# Altium PCB SmartIMU.PcbDoc (part 1 of 2)
Units mil, origin at the board's own origin, x right, y up, seen from the top; angles counter-clockwise.
Board outline 1102.36 x 1187.1 mil, 4 copper layers (Top Layer, Mid-Layer 1, Mid-Layer 2, Bottom Layer), stack 38.583 mil thick; 68 components, 83 nets, 416 pads, 140 vias.
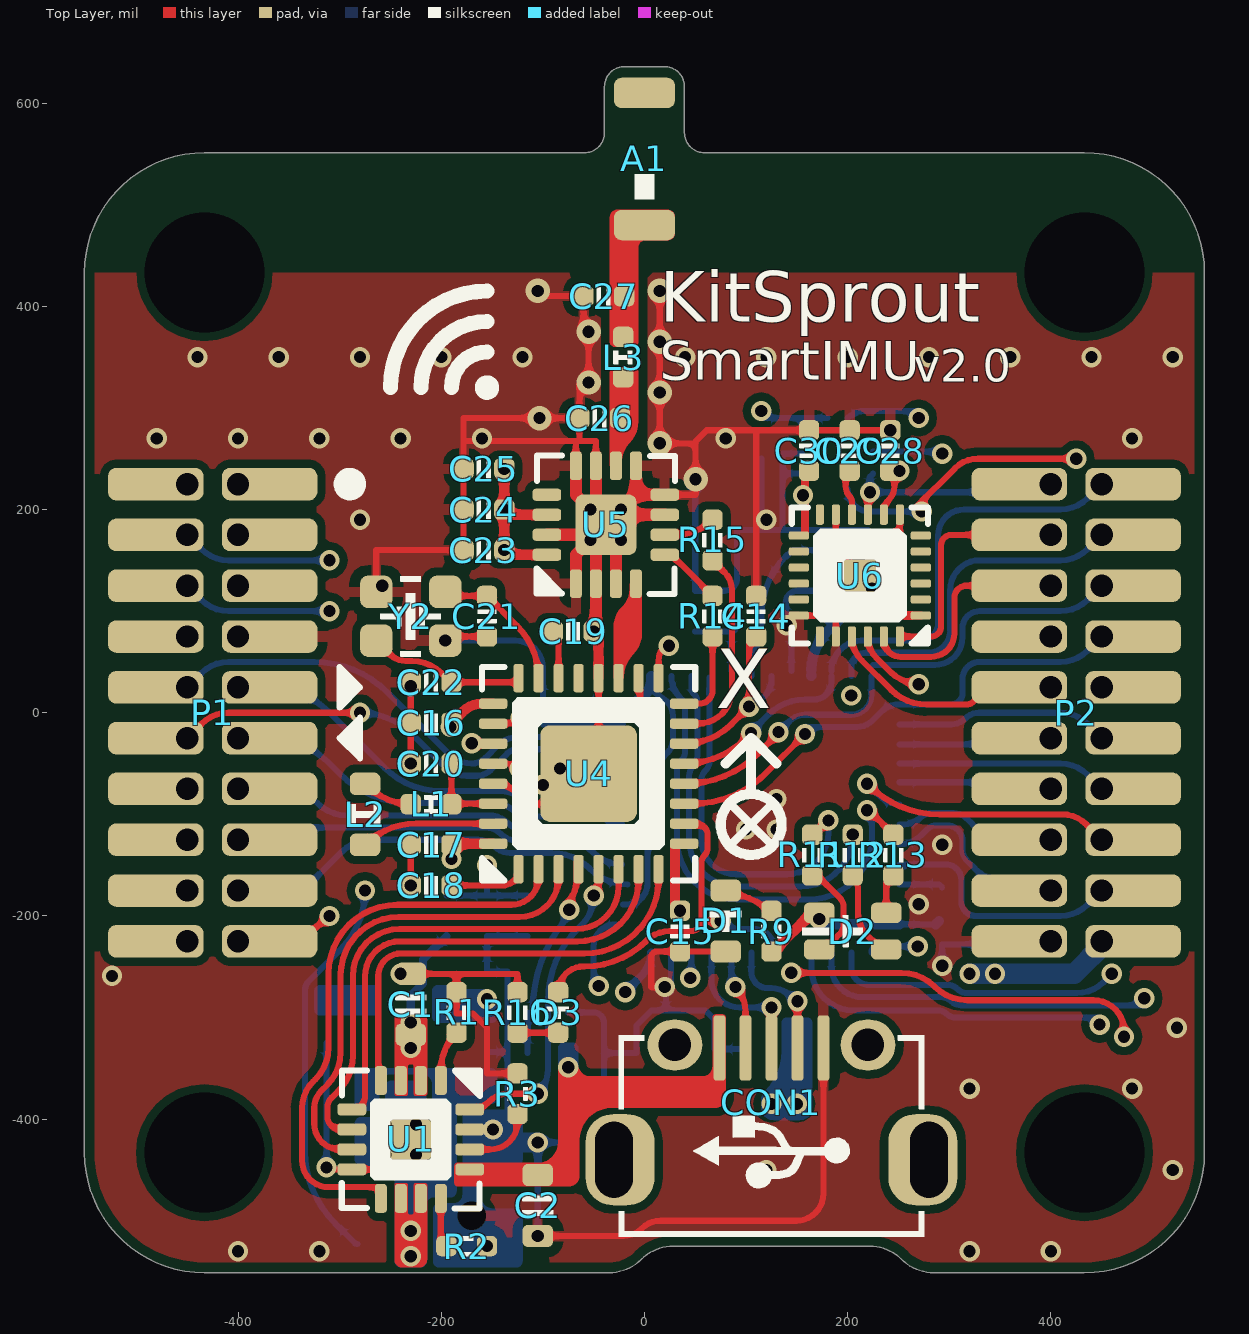
[diagram p0: Top Layer view]
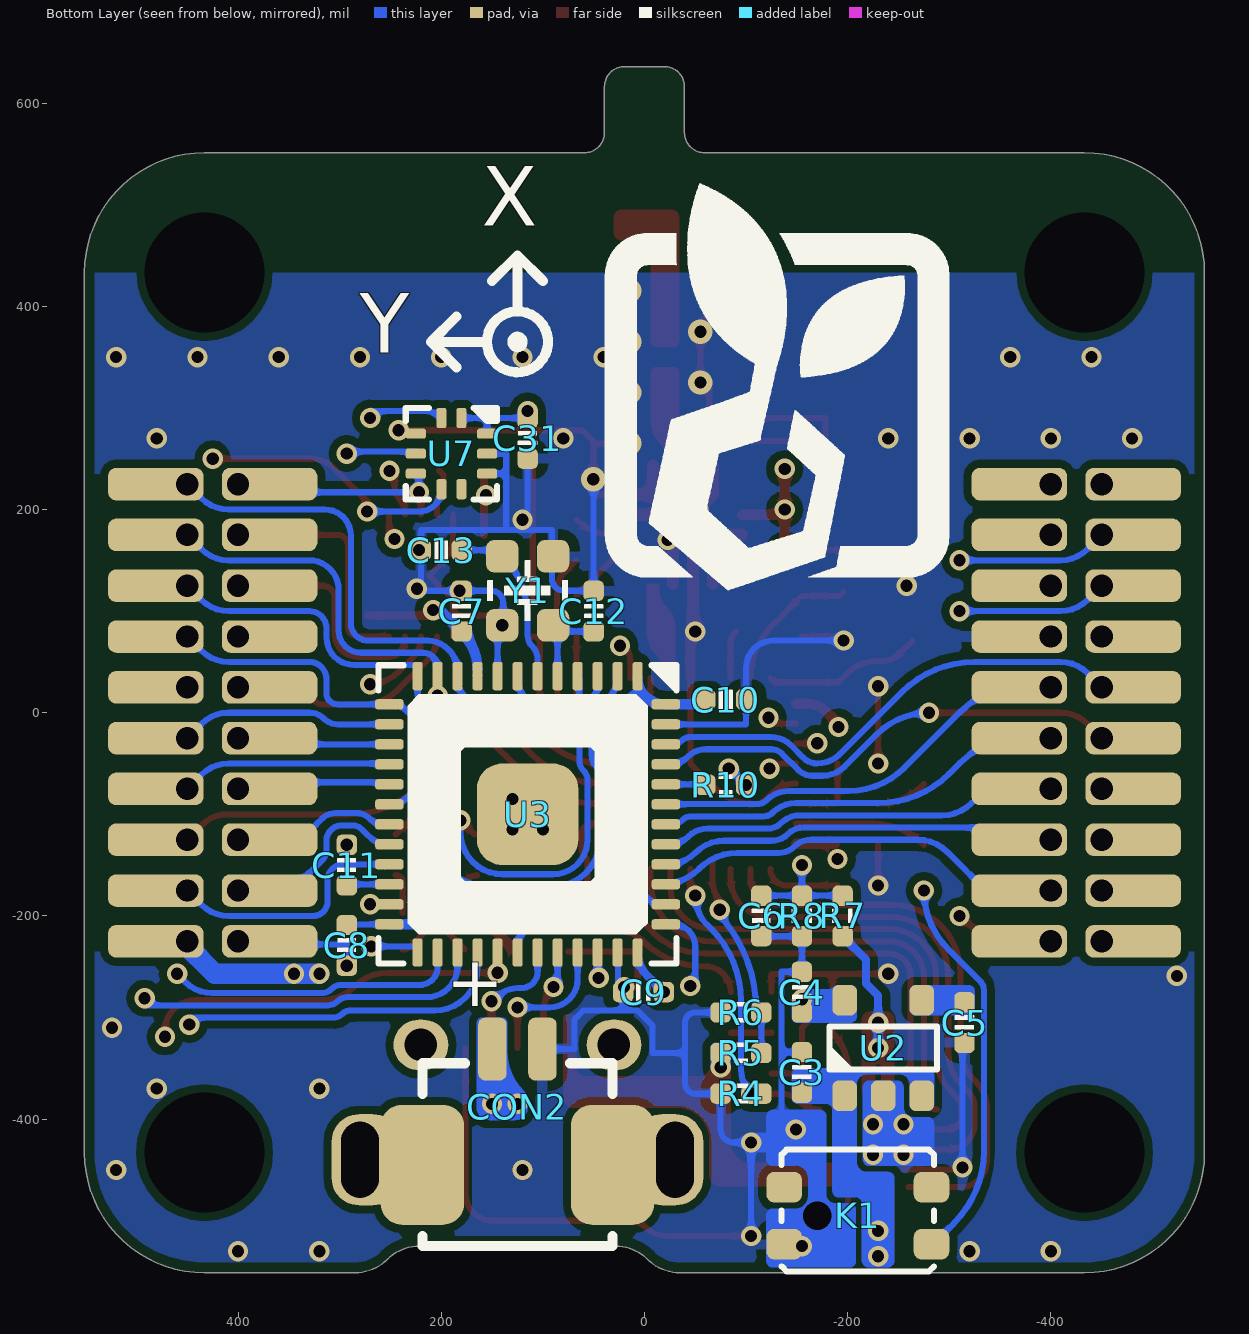
[diagram p1: Bottom Layer view, seen from below]
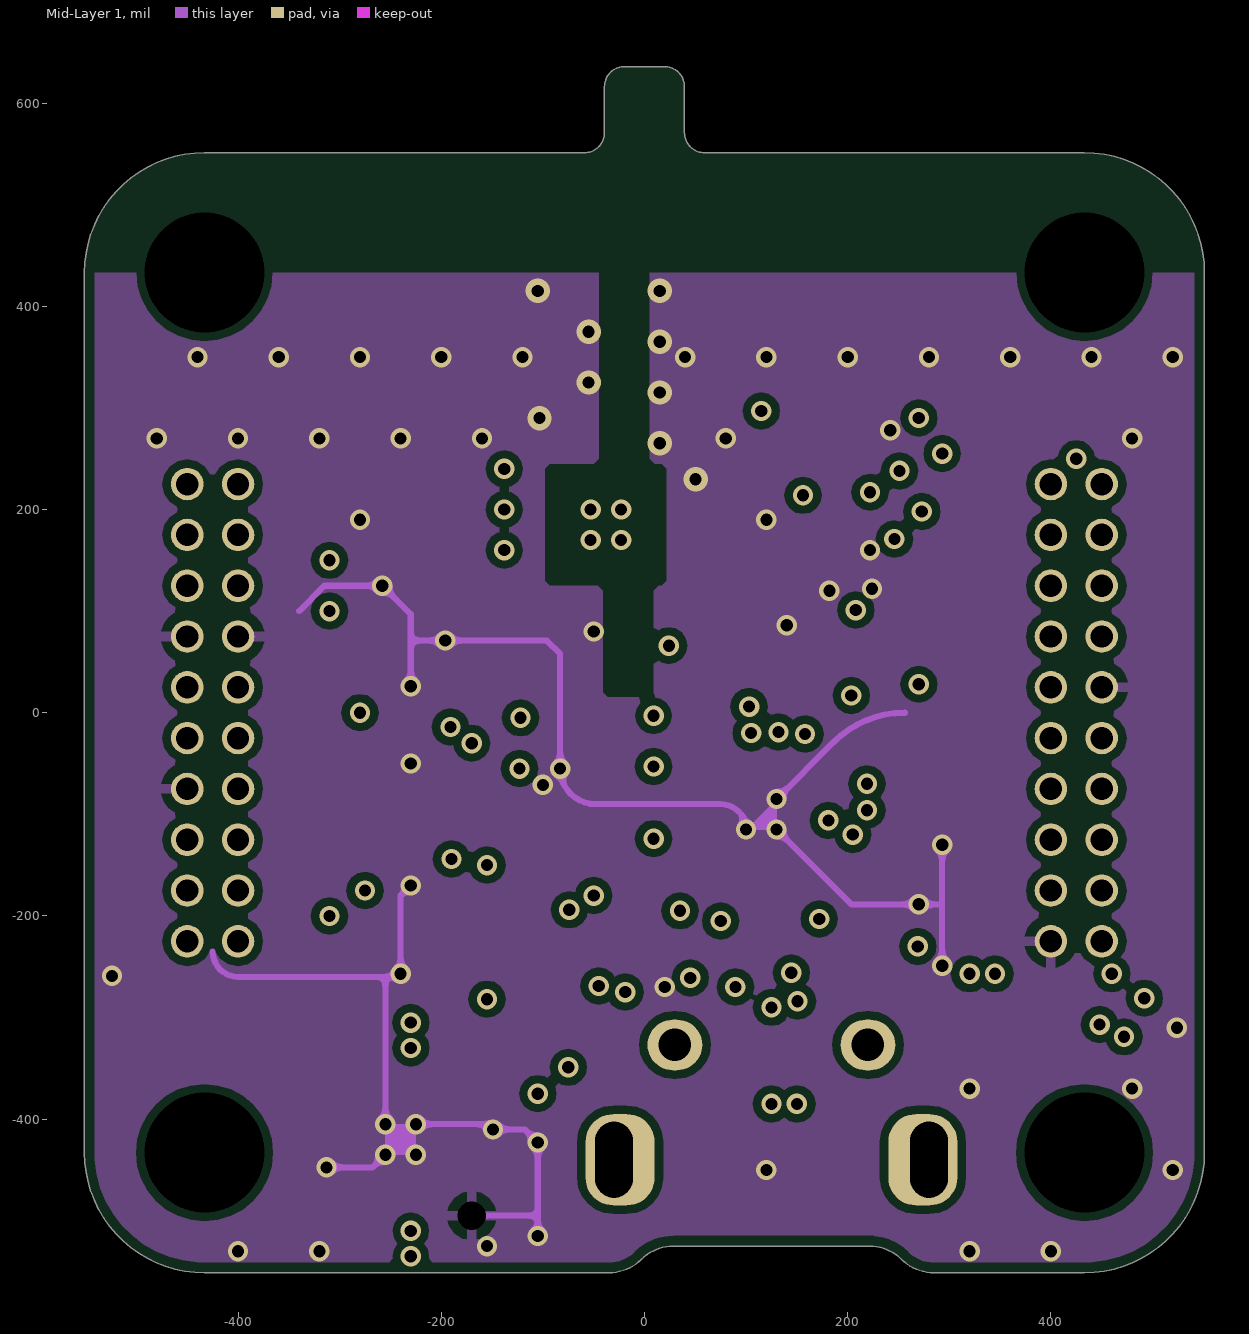
[diagram p2: Mid-Layer 1]
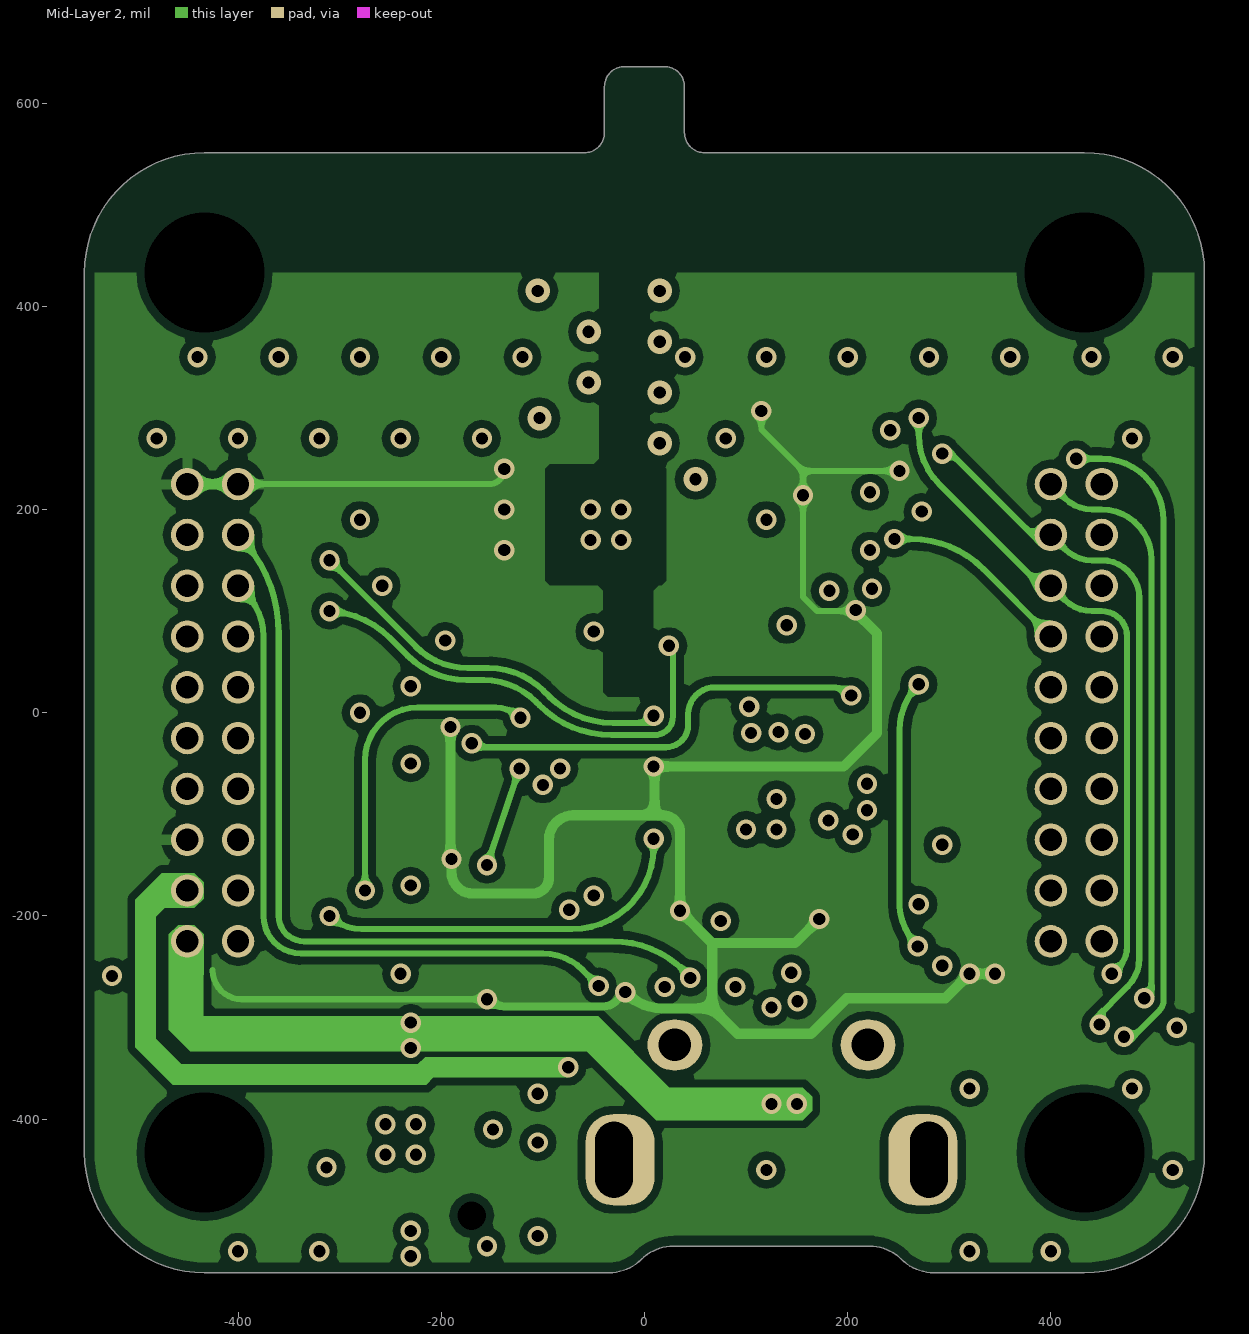
[diagram p3: Mid-Layer 2]
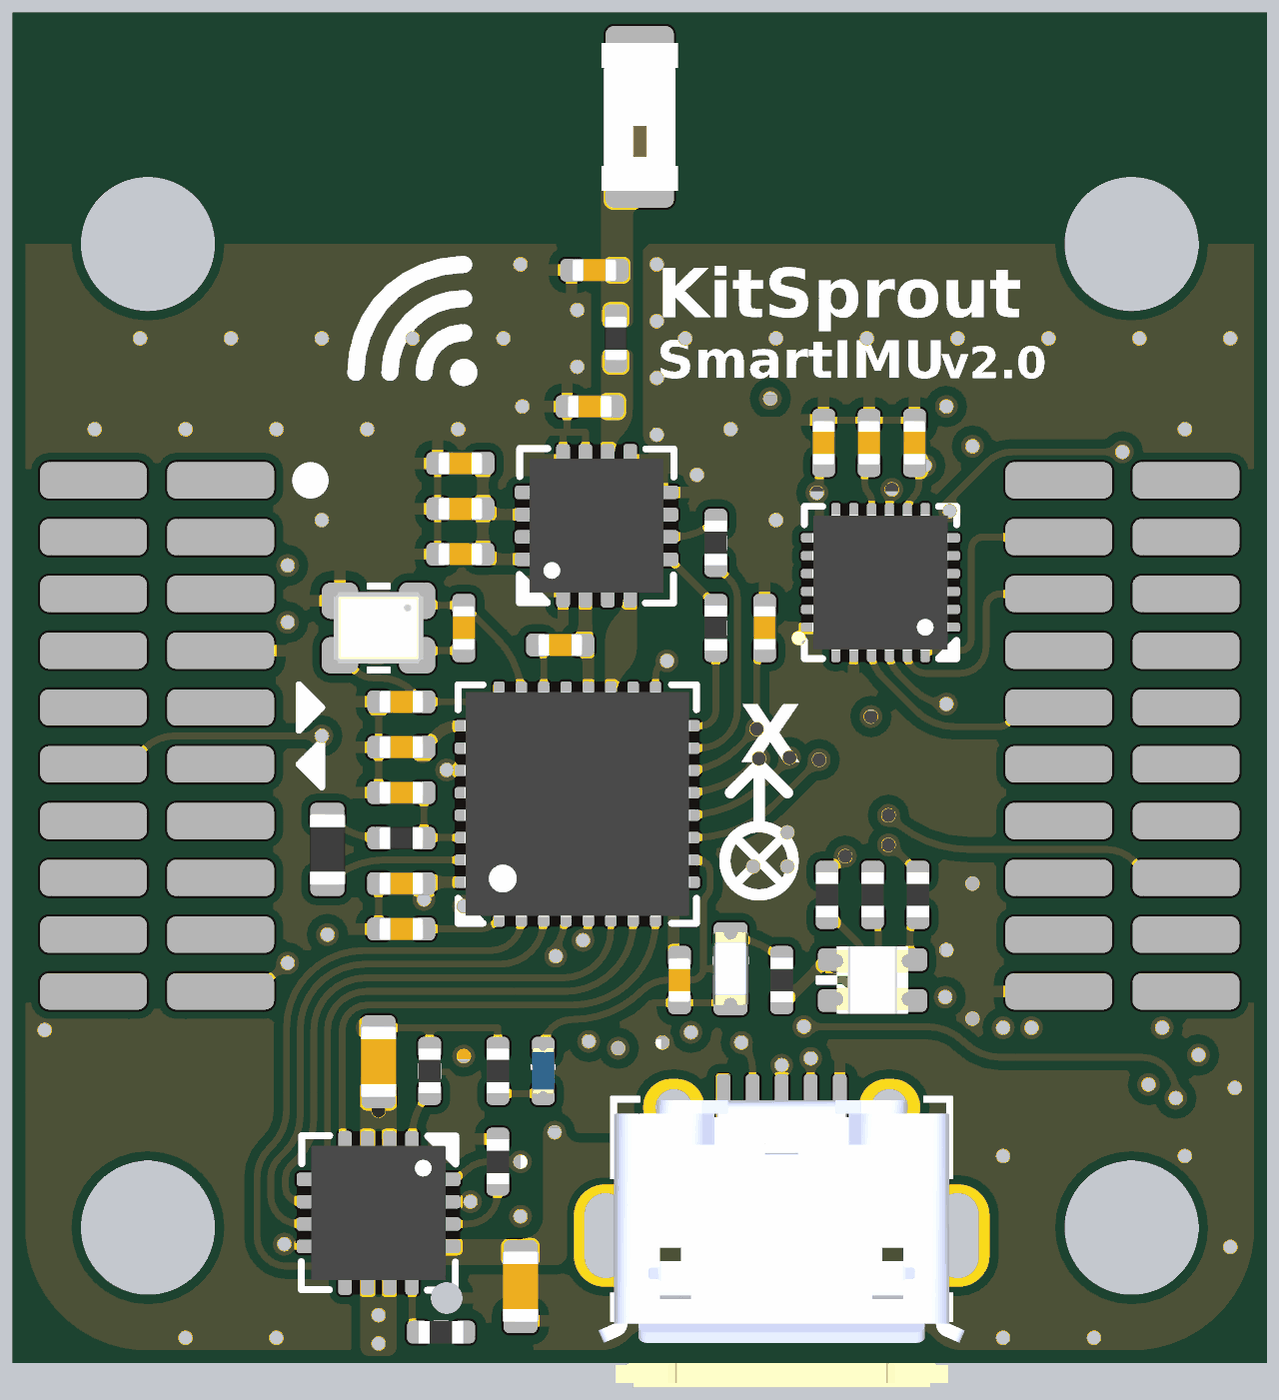
[diagram p5: 3D render of the assembled board from above, using the file's embedded part models]
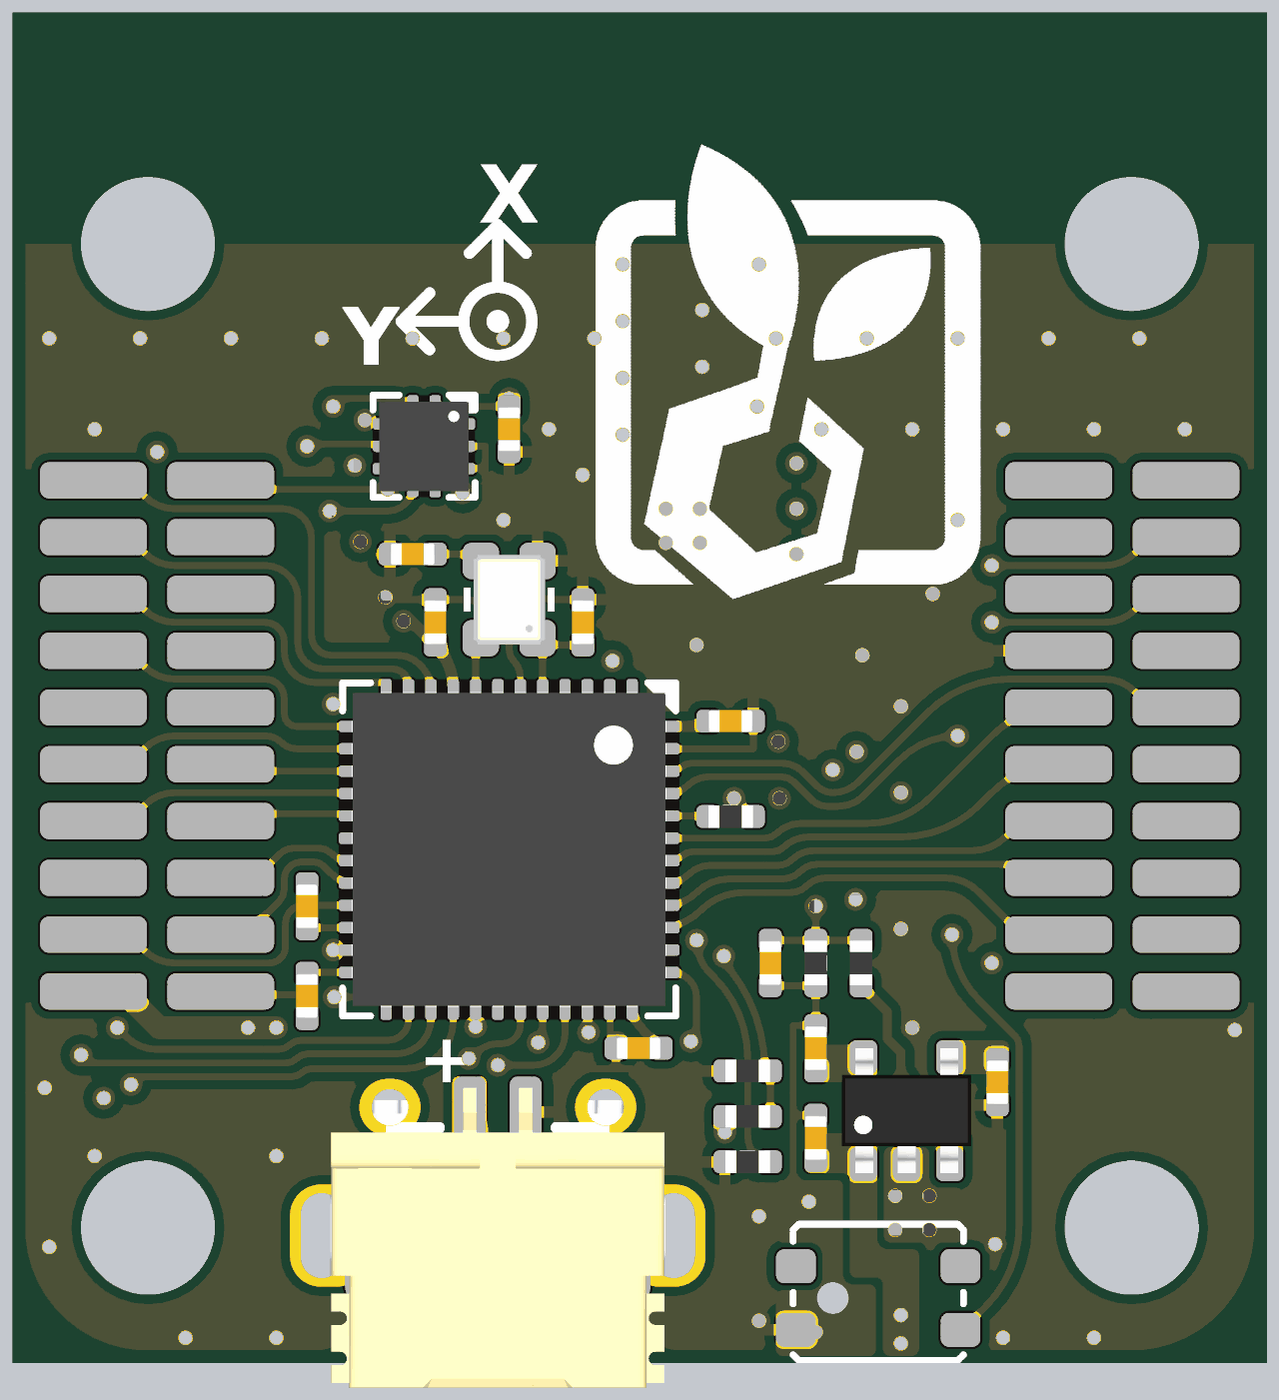
[diagram p6: 3D render of the assembled board from below, using the file's embedded part models]

## Layer stack, top to bottom
Top Solder: solder mask 0.3937, Solder Resist, Dk 3.5
Top Layer: signal copper 1.1811
Dielectric 1: prepreg 3.937, Dk 4.2
Mid-Layer 1: signal copper 0.3937
Dielectric3: core 27.5591, FR-4, Dk 4.2
Mid-Layer 2: signal copper 0.3937
Dielectric2: prepreg 3.937, Dk 4.2
Bottom Layer: signal copper 1.1811
Bottom Solder: solder mask 0.3937, Solder Resist, Dk 3.5

## Board outline
-551.18,-433.07 ccw(c-433.07,-433.07) -433.07,-551.18 -34.69,-551.18 ccw(c-34.69,-506.49) -3.09,-538.09 cw(c28.51,-569.69) 28.51,-525 221.49,-525 cw(c221.49,-569.69) 253.09,-538.09 ccw(c284.69,-506.49) 284.69,-551.18 433.07,-551.18 ccw(c433.07,-433.07) 551.18,-433.07 551.18,433.07 ccw(c433.07,433.07) 433.07,551.18 59.06,551.18 cw(c59.06,570.87) 39.37,570.87 39.37,616.24 ccw(c19.69,616.24) 19.69,635.92 -19.69,635.92 ccw(c-19.69,616.24) -39.37,616.24 -39.37,570.87 cw(c-59.06,570.87) -59.06,551.18 -433.07,551.18 ccw(c-433.07,433.07) -551.18,433.07

## Design rules (kind name [scope] priority, off if disabled: settings)
BoardOutlineClearance [All] p1: gap=10 ignorepadtopadclearanceinfootprint=FALSE except(0: Arc-SplitContinuation Track-SplitContinuation SMDPad-SplitContinuation THPad-SplitContinuation Via-SplitContinuation Fill-SplitContinuation Poly-SplitContinuation Region-SplitContinuation Text-SplitContinuation)
Clearance ClearancePolygon [InPolygon] p1: gap=8 ignorepadtopadclearanceinfootprint=FALSE except(0: Arc-Hole Track-Hole SMDPad-Hole THPad-Hole Via-Hole Fill-Hole Poly-Hole Region-Hole Text-Hole)
Clearance [All] p2: gap=6 ignorepadtopadclearanceinfootprint=FALSE except(0: Arc-Hole Track-Hole SMDPad-Hole THPad-Hole Via-Hole Fill-Hole Poly-Hole Region-Hole Text-Hole)
ComponentClearance [All] p1: gap=0 collisioncheckmode=3 verticalgap=0 showdistances=FALSE
Height [All] p1: minheight=0 maxheight=5000 prefheight=500
HoleSize [All] p1: absolutevalues=TRUE maxlimit=200 minlimit=1 maxpercent=80.000 minpercent=20.000
HoleToHoleClearance [All] p1: gap=6 allowstackedmicrovias=TRUE
MinimumAnnularRing [All] p1: minimumring=4
MinimumSolderMaskSliver [All] p1: minsoldermaskwidth=0
PlaneConnect [All] p1: pad.planeconnectstyle=Relief pad.reliefexpansion=20 pad.reliefentries=4 pad.reliefconductorwidth=10 pad.reliefairgap=10 via.planeconnectstyle=Direct via.reliefexpansion=20 via.reliefentries=4 via.reliefconductorwidth=10 via.reliefairgap=10
PolygonConnect [All] p1: thpad.connectstyle=Relief thpad.reliefconductorwidth=10 thpad.reliefentries=4 thpad.polygonreliefangle="90 Angle" thpad.airgapwidth=10 smdpad.connectstyle=Relief smdpad.reliefconductorwidth=10 smdpad.reliefentries=4 smdpad.polygonreliefangle="90 Angle" smdpad.airgapwidth=10 via.connectstyle=Direct via.reliefconductorwidth=10 via.reliefentries=4 via.polygonreliefangle="90 Angle" via.airgapwidth=10
RoutingVias [All] p1: holewidth=12 width=24 viastyle="Through Hole" minholewidth=12 minwidth=20 maxholewidth=28 maxwidth=50
SilkToSilkClearance [All] p1: silktosilkclearance=0
SilkToSolderMaskClearance [IsPad] p1: minsilkscreentomaskgap=0 clearancetoexposedcopper=TRUE
SolderMaskExpansion [All] p1: expansion=2
Width [All] p1: maxlimit=500 minlimit=6 preferedwidth=10
22 further rules are at their usual default settings.

## Classes and differential pairs
component class "[03] POWER": C1 C2 C3 C4 C5 C6 CON1 CON2 D1 R1 R2 R3 R4 R5 R6 R7 R8 R9 U1 U2
component class "[04] MICROCONTROLLER": C7 C8 C9 C10 C11 C12 C13 C14 D2 R10 R11 R12 R13 U3 Y1
component class "[05] RADIO": A1 C15 C16 C17 C18 C19 C20 C21 C22 C23 C24 C25 C26 C27 D3 K1 L1 L2 L3 R14 R15 R16 U4 U5 Y2
component class "[06] INERTIAL SENSOR": C28 C29 C30 C31 U6 U7
component class "[07] EXPANSION": P1 P2

## Components (designator, comment, footprint, x,y, rotation, side; value= is the part's Value field where it differs from the comment)
A1 "2.4GHz 50R" ANT_2.4G_3.2x1.6 0,545 r90 top locked value="-0.5 dBi"
C1 "C0603" CAP_0603 -230,-287 r270 top value=22uF
C2 "C0603" CAP_0603 -105,-485 r90 top value=4.7uF
C3 "C0402" CAP_0402 -155,-354 r270 bottom value=2.2uF
C4 "C0402" CAP_0402 -155,-275 r270 bottom value=2.2uF
C5 "C0402" CAP_0402 -315,-305 r90 bottom value=10nF
C6 "C0402" CAP_0402 -115,-200 r90 bottom value=0.1uF
C7 "C0402" CAP_0402 180,100 r270 bottom value=0.1uF
C8 "C0402" CAP_0402 293,-229 r90 bottom value=0.1uF
C9 "C0402" CAP_0402 1,-275 r180 bottom value=0.1uF
C10 "C0402" CAP_0402 -80,13 r0 bottom value=0.1uF
C11 "C0402" CAP_0402 293,-150 r270 bottom value=2.2uF
C12 "C0402" CAP_0402 50,100 r270 bottom value=10pF
C13 "C0402" CAP_0402 200,160 r180 bottom value=10pF
C14 "C0402" CAP_0402 110,95 r270 top value=0.1uF
C15 "C0402" CAP_0402 35,-215 r90 top value=0.1uF
C16 "C0402" CAP_0402 -210,-10 r0 top value=0.1uF
C17 "C0402" CAP_0402 -210,-130 r0 top value=4.7uF
C18 "C0402" CAP_0402 -210,-170 r0 top value=0.1uF
C19 "C0402" CAP_0402 -70,80 r180 top value=100pF
C20 "C0402" CAP_0402 -210,-50 r180 top value=1uF
C21 "C0402" CAP_0402 -155,95 r90 top value=10pF
C22 "C0402" CAP_0402 -210,30 r0 top value=10pF
C23 "C0402" CAP_0402 -158,160 r0 top value=4.7uF
C24 "C0402" CAP_0402 -158,200 r0 top value=0.1uF
C25 "C0402" CAP_0402 -158,240 r0 top value=220pF
C26 "C0402" CAP_0402 -44,290 r0 top value=0.8pF
C27 "C0402" CAP_0402 -40,410 r0 top value=1.2pF
C28 "C0402" CAP_0402 242,258 r270 top value=0.1uF
C29 "C0402" CAP_0402 202,258 r270 top value=0.1uF
C30 "C0402" CAP_0402 162,258 r270 top value=0.1uF
C31 "C0402" CAP_0402 115,270 r90 bottom value=0.1uF
CON1 "MicroUSB" USB_Micro-AB 125,-430 r180 top locked
CON2 "MX1.25_2P" MX1.25_S90_2P 125,-445 r180 bottom locked
D1 "WHITE" LED_0603_YELLOW 80,-205 r270 top
D2 "RGB" LED_1616_RGB 205,-215 r180 top
D3 "BLUE" LED_0402_BLUE -85,-295 r270 top
K1 "TACT 4P" ButtonTACT_3.4*3.5_90 -210,-495 r0 bottom locked value=3.4x3.5
L1 "H0402" IND_0402 -210,-90 r180 top value=15nH
L2 "H0603" IND_0603 -275,-100 r270 top value=10nH
L3 "H0402" IND_0402 -21,350 r90 top value=3.9nH
P1 "1.27" HDR2X10_1.27_180TBH -450,225 r0 top locked
P2 "1.27" HDR2X10_1.27_180TBH 400,225 r0 top locked
R1 "R0402" RES_0402 -185,-295 r270 top value=10K
R2 "R0402" RES_0402 -175,-525 r180 top value=1K
R3 "R0402" RES_0402 -125,-375 r270 top value=10K
R4 "R0402" RES_0402 -95,-375 r180 bottom value=1K
R5 "R0402" RES_0402 -95,-335 r0 bottom value=10K
R6 "R0402" RES_0402 -95,-295 r180 bottom value=10K
R7 "R0402" RES_0402 -195,-200 r270 bottom value=100K
R8 "R0402" RES_0402 -155,-200 r90 bottom value=100K
R9 "R0402" RES_0402 125,-215 r270 top value=1K
R10 "R0402" RES_0402 -80,-71 r0 bottom value=10K
R11 "R0402" RES_0402 165,-140 r270 top value=680R
R12 "R0402" RES_0402 205,-140 r270 top value=1K
R13 "R0402" RES_0402 245,-140 r270 top value=220R
R14 "R0402" RES_0402 67,95 r90 top value=1K
R15 "R0402" RES_0402 67,170 r90 top value=1K
R16 "R0402" RES_0402 -125,-295 r270 top value=150R
U1 "BQ24075" QFN_P0.5_PAD_16 -230,-420 r270 top locked
U2 "SP6205-33" SOT23-5 -235,-330 r90 bottom locked value=3V3
U3 "STM32F411" QFN_P0.5_48 115,-100 r270 bottom locked value=100MHz
U4 "nRF52810" QFN_P0.5_32 -55,-60 r90 top locked value=64MHz
U5 "RFX2401C" QFN_P0.5_16 -38,185 r90 top locked
U6 "ICM20948" QFN_P0.4_24 212,135 r180 top locked
U7 "LPS22HB" HCLGA-2x2_10 190,255 r270 bottom
Y1 "XTAL2016" XT_2016_4#1 115,120 r270 bottom value=16MHz
Y2 "XTAL2016" XT_2016_4#2 -230,95 r0 top value=32MHz

## Footprints (in the part's own frame and the unit in brackets; to place one, negate y for a bottom-side part, rotate by r counter-clockwise, add the part's x,y. Pads: shape width x height; smd on the part's side, far side on the other; paste and mask are expansions set on the pad)
ANT_2.4G_3.2x1.6 [mil]
  rrect50% 30x60 smd: 1(-65,0) 2(65,0)
  silkscreen extent -40,-10 -15,10, body extent -65,-33 65,33, height 53
ButtonTACT_3.4*3.5_90 [mil]
  round 20 hole 28 unplated mask-30: 0(40,0)
  rrect50% 35x30 smd: 1(-72.5,28) 2(72.5,28) 3(-72.5,-28) NC(72.5,-28)
  silkscreen extent -75,-65 75,55
CAP_0402 [mil]
  rrect50% 20x20 smd: 1(-20,0) 2(20,0)
  silkscreen extent -7,-9 7,9, body extent -20,-10 20,10, height 20
CAP_0603 [mil]
  rrect50% 22x30 smd: 1(-30,0) 2(30,0)
  silkscreen extent -10,-15 10,15, body extent -31,-16 31,16, height 31
HCLGA-2x2_10 [mil]
  rrect50% 20x10 smd: 1(-35,9.84) 2(-35,-9.84) 6(35,-9.84) 7(35,9.84)
  rrect50% 10x20 smd: 3(-19.69,-35) 4(0,-35) 5(19.69,-35) 8(19.69,35) 9(0,35) 10(-19.69,35)
  silkscreen extent -45,-45 45,45, body extent -39,-39 39,39, height 31
HDR2X10_1.27_180TBH [mil]
  rrect50% 94x32 smd: 1(-31,0) 2(81,0) 3(-31,-50) 4(81,-50) 5(-31,-100) 6(81,-100) 7(-31,-150) 8(81,-150) 9(-31,-200) 10(81,-200) 11(-31,-250) 12(81,-250) 13(-31,-300) 14(81,-300) 15(-31,-350) 16(81,-350) 17(-31,-400) 18(81,-400) 19(-31,-450) 20(81,-450)
  rrect50% 94x32 smd far side: 1(-31,0) 2(81,0) 3(-31,-50) 4(81,-50) 5(-31,-100) 6(81,-100) 7(-31,-150) 8(81,-150) 9(-31,-200) 10(81,-200) 11(-31,-250) 12(81,-250) 13(-31,-300) 14(81,-300) 15(-31,-350) 16(81,-350) 17(-31,-400) 18(81,-400) 19(-31,-450) 20(81,-450)
  round 32 hole 22: 1(0,0) 2(50,0) 3(0,-50) 4(50,-50) 5(0,-100) 6(50,-100) 7(0,-150) 8(50,-150) 9(0,-200) 10(50,-200) 11(0,-250) 12(50,-250) 13(0,-300) 14(50,-300) 15(0,-350) 16(50,-350) 17(0,-400) 18(50,-400) 19(0,-450) 20(50,-450)
IND_0402 [mil]
  rrect50% 20x20 smd: 1(-20,0) 2(20,0)
  silkscreen extent -6,-9 7,9, body extent -20,-10 20,10, height 20
IND_0603 [mil]
  rrect50% 22x30 smd: 1(-30,0) 2(30,0)
  silkscreen extent -10,-15 10,15, body extent -31,-16 31,16, height 31
LED_0402_BLUE [mil]
  rrect50% 20x20 smd: 1(-20,0) 2(20,0)
  silkscreen extent -6,-11 5,10, body extent -20,-10 20,10, height 18
LED_0603_YELLOW [mil]
  rrect50% 22x30 smd: 1(-30,0) 2(30,0)
  silkscreen extent -10,-16 10,16, body extent -32,-16 32,16, height 24
LED_1616_RGB [mil]
  rrect50% 30x20 smd: 1(-33,-18) 2(-33,18) 3(33,18) 4(33,-18)
  silkscreen extent -10,-15 50,16, body extent -31,-30 31,30, height 13
MX1.25_S90_2P [mil]
  rrect50% 82x118 smd: 0(-93.58,0) 0(93.58,0)
  rrect50% 28x62 smd: 1(-24.61,114) 2(24.61,114)
  silkscreen extent -94,-80 94,100, body extent -147,-129 147,135, height 98
QFN_P0.4_24 [mil]
  rrect50% 20x8 smd: 1(-60,39.37) 2(-60,23.62) 3(-60,7.87) 4(-60,-7.87) 5(-60,-23.62) 6(-60,-39.37) 13(60,-39.37) 14(60,-23.62) 15(60,-7.87) 16(60,7.87) 17(60,23.62) 18(60,39.37)
  rrect50% 8x20 smd: 7(-39.37,-60) 8(-23.62,-60) 9(-7.87,-60) 10(7.87,-60) 11(23.62,-60) 12(39.37,-60) 19(39.37,60) 20(23.62,60) 21(7.87,60) 22(-7.87,60) 23(-23.62,60) 24(-39.37,60)
  rrect20% 32x32 smd: 25(0,0)
  silkscreen extent -67,-67 67,67, body extent -60,-60 60,60, height 39
QFN_P0.5_16 [mil]
  rrect50% 28x12 smd: 1(-58,29.53) 2(-58,9.84) 3(-58,-9.84) 4(-58,-29.53) 9(58,-29.53) 10(58,-9.84) 11(58,9.84) 12(58,29.53)
  rrect50% 12x28 smd: 5(-29.53,-58) 6(-9.84,-58) 7(9.84,-58) 8(29.53,-58) 13(29.53,58) 14(9.84,58) 15(-9.84,58) 16(-29.53,58)
  silkscreen extent -68,-68 68,68, body extent -59,-59 59,59, height 39
QFN_P0.5_32 [mil]
  rrect50% 28x10 smd: 1(-94,68.9) 2(-94,49.21) 3(-94,29.53) 4(-94,9.84) 5(-94,-9.84) 6(-94,-29.53) 7(-94,-49.21) 8(-94,-68.9) 17(94,-68.9) 18(94,-49.21) 19(94,-29.53) 20(94,-9.84) 21(94,9.84) 22(94,29.53) 23(94,49.21) 24(94,68.9)
  rrect50% 10x28 smd: 9(-68.9,-94) 10(-49.21,-94) 11(-29.53,-94) 12(-9.84,-94) 13(9.84,-94) 14(29.53,-94) 15(49.21,-94) 16(68.9,-94) 25(68.9,94) 26(49.21,94) 27(29.53,94) 28(9.84,94) 29(-9.84,94) 30(-29.53,94) 31(-49.21,94) 32(-68.9,94)
  rrect20% 95x95 smd: 33(0,0)
  silkscreen extent -105,-105 105,105, body extent -99,-99 99,99, height 22
QFN_P0.5_48 [mil]
  rrect50% 28x10 smd: 1(-136,108.27) 2(-136,88.58) 3(-136,68.9) 4(-136,49.21) 5(-136,29.53) 6(-136,9.84) 7(-136,-9.84) 8(-136,-29.53) 9(-136,-49.21) 10(-136,-68.9) 11(-136,-88.58) 12(-136,-108.27) 25(136,-108.27) 26(136,-88.58) 27(136,-68.9) 28(136,-49.21) 29(136,-29.53) 30(136,-9.84) 31(136,9.84) 32(136,29.53) 33(136,49.21) 34(136,68.9) 35(136,88.58) 36(136,108.27)
  rrect50% 10x28 smd: 13(-108.27,-136) 14(-88.58,-136) 15(-68.9,-136) 16(-49.21,-136) 17(-29.53,-136) 18(-9.84,-136) 19(9.84,-136) 20(29.53,-136) 21(49.21,-136) 22(68.9,-136) 23(88.58,-136) 24(108.27,-136) 37(108.27,136) 38(88.58,136) 39(68.9,136) 40(49.21,136) 41(29.53,136) 42(9.84,136) 43(-9.84,136) 44(-29.53,136) 45(-49.21,136) 46(-68.9,136) 47(-88.58,136) 48(-108.27,136)
  rrect50% 100x100 smd: 49(0,0)
  silkscreen extent -147,-147 147,147, body extent -139,-139 139,139, height 22
QFN_P0.5_PAD_16 [mm]
  rrect50% 0.72x0.3 smd: 1(-1.473,0.75) 2(-1.473,0.25) 3(-1.473,-0.25) 4(-1.473,-0.75) 9(1.473,-0.75) 10(1.473,-0.25) 11(1.473,0.25) 12(1.473,0.75)
  rrect50% 0.3x0.72 smd: 5(-0.75,-1.473) 6(-0.25,-1.473) 7(0.25,-1.473) 8(0.75,-1.473) 13(0.75,1.473) 14(0.25,1.473) 15(-0.25,1.473) 16(-0.75,1.473)
  rrect20% 1.016x1.016 smd: 17(0,0)
  silkscreen extent -1.73,-1.73 1.73,1.73, body extent -1.5,-1.5 1.5,1.5, height 1
RES_0402 [mil]
  rrect50% 20x20 smd: 1(-20,0) 2(20,0)
  silkscreen extent -6,-10 7,10, body extent -20,-10 20,10, height 14
SOT23-5 [mil]
  rrect50% 30x24 smd: 1(-47,38) 2(-47,0) 3(-47,-38) 4(47,-38) 5(47,38)
  silkscreen extent -21,-53 21,53, body extent -55,-57 55,57, height 57
USB_Micro-AB [mil]
  rrect80% 68x90 hole 37 slot 75 at 90 deg copper offset 6,0 mask+0: 0(-155,10)
  oval 54x50 hole 32 mask+0: 0(-95,-103) 0(95,-103)
  rrect80% 68x90 hole 37 slot 75 at 90 deg copper offset -6,0 mask+0: 0(155,10)
  rrect50% 12x64 smd: 1(51.18,-100) 2(25.59,-100) 3(0,-100) 4(-25.59,-100) 5(-51.18,-100)
  silkscreen extent -151,-113 150,86, body extent -161,-109 161,104, height 108
XT_2016_4#1 [mil]
  rrect50% 32x32 smd: 1(34,25) 2(-34,25) 3(-34,-25) 4(34,-25)
  silkscreen extent -30,-40 29,40, body extent -39,-31 39,32, height 28
XT_2016_4#2 [mil]
  rrect50% 32x32 smd: 1(34,24) 2(-34,24) 3(-34,-24) 4(34,-24)
  silkscreen extent -30,-40 30,40, body extent -39,-31 39,31, height 28

## Part data
A1: library part Ant_2.4G, "Antenna", Type=3.2x1.6
C1 C2: library part Cap_0603, "Capacitor", Specification="X7R 50V", Type=0603
C3 C4 C5 C6 C7 C8 C9 C10 C11 C12 C13 C14 C15 C16 C17 C18 C19 C20 C21 C22 C23 C24 C25 C26 C27 C28 C29 C30 C31: library part Cap_0402, "Capacitor", Specification="X7R 50V", Type=0402
CON1: library part USB_Micro, "USB", Type=B-type
CON2: "MX"
D1: library part LED_0603, "LED", Type=0603
D2: library part LED_1616_RGB, "LED", Type=1616
D3: library part LED_0402, "LED", Type=0402
K1: library part ButtonTACT, "Button", Type="TACT 4P"
L1 L3: library part Ind_0402, "Inductor", Specification="∮5% 100mA", Type=0402
L2: library part Ind_0603, "Inductor", Specification="∮5% 100mA", Type=0603
P1 P2: library part HDR2x10_1.27, "Header", Type="SMD 2x10"
R1 R2 R3 R4 R5 R6 R7 R8 R9 R10 R11 R12 R13 R14 R15 R16: library part Res_0402, "Resistor", Specification=∮5%, Type=0402
U1: "Power", Type="QFN16 P0.5"
U2: library part RT9193, "Power", Type=SOT23-5
U3: library part STM32F4x1C, "MCU", Type="QFN48 P0.5"
U4: "MCU", Type="QFN48 P0.4"
U5: "Radio PA/LNA", Type="QFN16 P0.5"
U6: library part MPU925x, "Sensor Motion", Type="QFN24 P0.4"
U7: "Sensor Pressure", Type="LGA10 P0.5"
Y1 Y2: library part XTAL_2016_4P, "Crystal Oscillator", Type=XTAL2016

## Free pads (board coordinates)
  round 115 hole 118.11 unplated mask+0: 0(-433.07,-433.07) 0(-433.07,433.07) 0(433.07,-433.07) 0(433.07,433.07)
  rrect25% 60x60 smd: 0(-38,185)

## Via types
v1: diameter 20, hole 12, Top Layer to Bottom Layer, tented both sides, 131 vias
v2: diameter 24, hole 12, Top Layer to Bottom Layer, tented both sides, 9 vias

## Nets (pads, with @x,y where several pads share a name; then routed paths per layer and width w, separated by ;. In a path a pad name is that pad's centre, name@x,y a point inside that pad or via, vN(x,y) a via of type N, cw(c..) or ccw(c..) an arc to the next point about the centre after c; other vN are vias at no path point)
+3V3: C4.2 C7.2 C8.2 C9.2 C10.2 C15.2 C16.2 C17.2 C23.2 C24.2 C25.2 C28.2 C30.2 C31.2 D2.4 P1.1 P1.2 P1.15 P2.20 R9.2 U2.5 U3.1 U3.9 U3.24 U3.36 U3.48 U4.9 U4.25 U4.32 U5.14 U5.16 U6.1 U6.8 U6.13 U7.1 U7.10 | length 3850.8
  Top Layer w6: U6.8@235.62,195 235.62,197.33 cw(c253.67,197.33) 240.91,210.09 ccw(c228.61,222.39) 246,222.39 ; 246,223.39 C28.2@246,234
  Top Layer w8: U6.13@158,175 C30.2@158,231 ; v1(208,101) 213.37,95.63 U6.1@272,95.63
  Top Layer w10: C16.2@-190,-10 -179,1 cw(c-159.93,-18.07) -159.93,8.9 U4.25@-149,8.9 ; C17.2@-187.34,-128.9 U4.32@-149,-128.9 ; v1(-138,240) v1(-138,200) ; U5.16@-96,155.47 -133.47,155.47 v1(-138,160) v1(-138,200) ; U5.14@-96,194.84 -132.84,194.84 v1(-138,200) ; C15.2@30,-195 U4.9@30,-130 ; R9.2@127,-235 D2.4@165,-197
  Mid-Layer 2 w6: -425,-253.51 ccw(c-396.51,-253.51) -396.51,-282 v1(-155,-282) ; P1.2@-400,225 -153,225 ccw(c-153,240) v1(-138,240) ; v1(9,-53) v1@10,-53 ; v1(115,297) 115,279 156,238 ; v1@160,210 v1(156,214) ; v1@206,101 cw(c205,101) 205,100 170,100 156,114 v1(156,214) ; v1(251,238) 156,238 ; v1(156,214) 156,238
  Mid-Layer 2 w8: v1(-155,-282) ccw(c-138.1,-265.1) -138.1,-289 -40.07,-289 ccw(c-40.07,-271.93) -28,-284 v1(-19,-275)
  Mid-Layer 2 w10: P1.1@-450,225 P1.2@-400,225 ; v1@-191,-144 v1(-191,-14) ; v1(-190,-144) -190,-157 ccw(c-169,-157) -169,-178 -110,-178 ccw(c-110,-162) -94,-162 -94,-124.8 cw(c-70.2,-124.8) -70.2,-101 10,-101 ; v1(-19,-275) -17.85,-276.15 ccw(c18,-240.3) 18,-291 66.79,-291 ; 66.79,-226.74 148.26,-226.74 v1(172,-203) ; v1@206,101 229,78 229,-20 196,-53 10,-53 10,-101 ; v1(345,-257) v1(320,-257) 296,-281 199,-281 164,-316 91.79,-316 66.79,-291 ; 10,-101 18,-101 cw(c18,-118) 35,-118 v1(35,-195) 66.79,-226.79 66.79,-291
  Bottom Layer w6: v1(9,-53) 23,-39 ccw(c11.12,-27.12) 27.92,-27.12 27.92,-4.74 ; 9,21 22.14,11.14 cw(c8,-3) 28,-3 ; C31.2@115,290 155,290 ; U7.10@155,274.69 155,290 ; U7.1@180.16,290 155,290 ; U3.24@251,-208.27 C8.2@286.73,-208.27
  Bottom Layer w8: v1(-19,-275) -2.65,-258.65 ccw(c-25.3,-236) U3.36@6.73,-236
  Bottom Layer w10: C10.2@-58.27,8.27 U3.48@-21,8.27 ccw(c-21,37.88) -0.06,16.94 ccw(c-16.45,33.34) 6.73,33.34 U3.1@6.73,36 ; U3.9@164.21,36 U3.9@164.21,36.89 ; U3.9@164.21,41.89 cw(c218.11,41.89) C7.2@180,80 201,101 v1@206,101 ; v1(172,-203) ccw(c184.72,-190.28) 184.72,-208.27 U3.24@251,-208.27 ; C8.2@286.73,-208.27 C8.2@290,-205
  Bottom Layer w20: v1(320,-257) v1(345,-257) 423,-257 446.46,-233.54 ccw(c437.93,-225) P2.20@450,-225
+VBAT: C1.2 CON2.1 P1.19 R7.2 U1.2 U1.3 | length 124.5
  Bottom Layer w8: v1(-230,-330) v1(-230,-305) -230,-278.37 -218,-266.37 -218,-243 R7.2@-195,-220
  other v1: 125,-385 150,-385
+VBUS: C2.2 CON1.1 P1.17 R5.2 U1.13 | length 367.3
  Top Layer w12: U1.13@-172,-449.53 C2.2@-110.47,-449.53 ; C2.2@-105,-455 ccw(c-105,-425) -75,-425 -75,-365 ; v1@-75,-345 -75,-365 ; CON1.1@73.82,-330 73.82,-356.18 65,-365 -75,-365
  other v1: -75,-349
+VIN: C3.2 U1.10 U1.11 U2.1 U2.3 | length 63.8
  Bottom Layer w6: v1(-230,-510) v1@-226.29,-506.29 ; -197,-435.58 U2.1@-197,-377
  other v1: -230,-535
ANT: U4.19 U5.4
ANT_PA: A1.1 C27.2 L3.2
EX_PA4: P2.12 U3.14 | length 210.8
  Bottom Layer w6: U3.14@251,-11.42 301.92,-11.42 ccw(c301.92,8.07) 315.71,-5.71 cw(c329.49,-19.49) 329.49,0 409.44,0 cw(c409.44,-37.56) 436,-11 P2.12@450,-25
EX_PA5: P2.11 U3.15 | length 120.6
  Bottom Layer w6: U3.15@251,-31.1 355.27,-31.1 ccw(c355.27,-10.27) P2.11@370,-25
EX_PA6: P2.14 U3.16 | length 207.7
  Bottom Layer w6: U3.16@251,-50 409.44,-50 cw(c409.44,-87.56) 436,-61 P2.14@450,-75
EX_PA7: P2.13 U3.17 | length 120.2
  Bottom Layer w6: U3.17@251,-68.47 P2.13@359.07,-68.47 ; P2.13@359.07,-70.47 cw(c359.07,-85.93) P2.13@370,-75
EX_PA15: P1.20 U3.38 | length 523.5
  Top Layer w6: P1.20@-370,-225 ccw(c-370,-140.5) -310.25,-200.25 v1(-310,-200)
  Mid-Layer 2 w6: v1(-310,-200) ccw(c-278.62,-168.62) -278.62,-213 -71.31,-213 ccw(c-71.31,-132.69) 9,-132.69 v1(9,-124)
  Bottom Layer w6: U3.38@-21,-188.58 -17.58,-188.58 ccw(c-17.58,-168) 3,-168 v1@3,-124
EX_PB0: P2.16 U3.18 | length 285.7
  Top Layer w6: v1@219.71,-70.71 ccw(c290.42,0) 290.42,-100 410.86,-100 cw(c410.86,-134.14) 435,-110 P2.16@450,-125 ; v1@221,-70 v1@221.71,-70.71
  Bottom Layer w6: v1@221,-70 ccw(c223.41,-70) 221.71,-71.71 232.49,-82.49 ccw(c251,-63.98) U3.18@251,-90.16
  other v1: 219,-70
EX_PB1: P2.15 U3.19 | length 128.8
  Bottom Layer w6: U3.19@251,-109.84 255.98,-109.84 ccw(c255.98,-87.58) 271.72,-103.32 cw(c282.65,-114.25) 282.65,-98.8 304.28,-98.8 cw(c304.28,-116.94) 317.11,-104.11 323,-110 ccw(c359.21,-73.79) 359.21,-125 P2.15@369,-125
EX_PB2: P2.17 U3.20 | length 188.8
  Bottom Layer w6: U3.20@251,-129.53 ccw(c251,-99.42) 272.29,-120.71 278.46,-114.54 cw(c287,-123.07) 287,-111 298,-111 cw(c298,-126) 313,-126 313,-134.85 ccw(c328.15,-134.85) 317.43,-145.55 325.44,-153.56 ccw(c377.2,-101.8) 377.2,-175 P2.17@400,-175
EX_PB3: P1.18 U3.39 | length 414
  Bottom Layer w6: P1.18@-400,-175 P1.18@-369,-175 -336,-175 -298,-137 cw(c-269.03,-165.97) -269.03,-125 -163.9,-125 cw(c-163.9,-148.9) -147,-132 ccw(c-132.51,-117.51) -132.51,-138 -91.22,-138 cw(c-91.22,-190.75) -53.95,-153.42 ; -53.91,-153.46 ccw(c-16.62,-116.15) U3.39@-16.62,-168.9
EX_PB4: P1.16 U3.40 | length 375.3
  Bottom Layer w6: P1.16@-388,-113 -156.56,-113 cw(c-156.56,-134.56) -141.32,-119.32 ccw(c-125.18,-103.18) -125.18,-126 -78.41,-126 cw(c-78.41,-165.63) -50.42,-137.58 ccw(c-22.37,-109.59) U3.40@-22.37,-149.21
EX_PB5: P1.14 U3.41 | length 345.9
  Bottom Layer w6: P1.14@-355.8,-75 cw(c-355.8,-122.8) -322,-89 ccw(c-293.03,-60.03) -293.03,-101 -153.31,-101 cw(c-153.31,-128.31) -134,-109 ccw(c-121.93,-96.93) -121.93,-114 -61.98,-114 cw(c-61.98,-140.51) -43.25,-121.75 ccw(c-24.49,-103.02) U3.41@-24.49,-129.53
EX_PB6: P1.12 U3.42 | length 372
  Bottom Layer w6: P1.12@-370,-25 cw(c-370,-109.5) -310.25,-49.75 -299.99,-60.01 ccw(c-230,9.98) -230,-89 -148.81,-89 cw(c-148.81,-120.81) -126.32,-98.32 ccw(c-117.42,-89.42) -117.42,-102 -46.43,-102 cw(c-46.43,-115.12) -37.17,-105.83 ccw(c-27.87,-96.53) -27.87,-109.69 U3.42@-22.16,-109.69
EX_PB7: P1.10 U3.43 | length 387.6
  Bottom Layer w6: P1.10@-370,25 cw(c-370,-59.5) -310.25,0.25 -255.79,-54.21 ccw(c-200.77,0.81) -200.77,-77 -142.18,-77 cw(c-142.18,-108.18) -120.13,-86.13 ccw(c-110.79,-76.79) -110.79,-90 U3.43@-21.16,-90
EX_PB8: P1.11 U3.45 | length 468.4
  Top Layer w6: P1.11@-450,-25 -436,-11 cw(c-409.44,-37.56) -409.44,0 v1(-280,0)
  Bottom Layer w6: v1(-280,0) cw(c-280,-72.43) -228.79,-21.21 -197.18,-52.82 ; -197.16,-52.84 ccw(c-175.02,-30.65) -175.02,-62 -165,-62 ccw(c-165,-42.69) -151.36,-56.36 -135.24,-40.24 cw(c-125,-50.49) -125,-36 -60.46,-36 cw(c-60.46,-61.24) -42.62,-43.38 ccw(c-24.73,-25.48) U3.45@-24.73,-50.79
EX_PB9: P1.9 U3.46 | length 484.1
  Bottom Layer w6: P1.9@-450,25 -436,39 cw(c-409.44,12.44) -409.44,50 -325,50 cw(c-325,-51.4) -253.3,20.3 -192.19,-40.81 ccw(c-170,-18.62) -170,-50 ccw(c-170,-30.69) -156.34,-44.34 -143.78,-31.78 cw(c-125,-50.56) -125,-24 -45.66,-24 cw(c-45.66,-37.66) -36,-28 ccw(c-28.51,-20.51) -28.51,-31.1 U3.46@-21,-31.1
EX_PB10: P2.18 U3.21 | length 244.3
  Bottom Layer w6: U3.21@251,-149.21 ccw(c255.83,-144.38) U3.21@255.83,-151.21 ; U3.21@255.83,-149.21 296.21,-149.21 cw(c296.21,-165) 312,-165 ; 312,-167 312,-186 ccw(c326,-186) 326,-200 409.44,-200 ccw(c409.44,-162.44) 436,-189 P2.18@450,-175
GND: C1.1 C2.1 C3.1 C4.1 C5.1 C6.1 C7.1 C8.1 C9.1 C10.1 C11.1 C12.1 C13.1 C14.1 C15.1 C16.1 C17.1 C18.1 C19.1 C20.2 C21.1 C22.1 C23.1 C24.1 C25.1 C26.1 C27.1 C28.1 C29.1 C30.1 C31.1 CON1.5 CON2.2 D1.2 K1.0 K1.2 P1.7 P1.8 P1.13 P2.10 P2.19 pad.0@-38,185 R1.1 R2.1 R3.1 R4.1 R6.1 R8.1 R10.1 R16.1 U1.8 U1.15 U1.17 U2.2 U3.8 U3.23 U3.35 U3.47 U3.49 U4.20 U4.29 U4.33 U5.1 U5.2 U5.3 U5.7 U5.8 U5.9 U5.11 U5.12 U5.15 U6.11 U6.18 U6.20 U6.25 U7.3 U7.8 U7.9 Y1.2 Y1.4 Y2.2 Y2.4 | length 7442.8
  Top Layer w6: v1@-318,-445.53 ccw(c-314,-445.53) -314,-449.53 U1.8@-288,-449.53 -255,-449.53 v1(-255,-435) ; Y2.2@-264,119 -264,160 C23.1@-178,160 C24.1@-178,200 C25.1@-178,240 -178,267.47 ; C1.1@-230,-257 -185,-257 ; v1(-230,-170) C17.1@-230,-130 ; v1(-230,-50) C16.1@-230,-10 C22.1@-230,30 ; v1(-196,71) cw(c-186.34,61.34) -186.34,75 C21.1@-155,75 ; U4.29@-149,-69.84 -146.69,-69.84 cw(c-146.69,-97.69) -127,-78 -119.95,-85.05 ccw(c-108,-73.1) -108,-90 ccw(c-108,-34.47) -68.74,-73.74 U4.33@-55,-60 -45.16,-50.16 U4.20@-45.16,34 ; R3.1@-125,-355 -155,-355 -155,-310 -169,-296 -185,-296 R1.1@-185,-275 -185,-257 ; R16.1@-125,-275 -125,-257 -185,-257 ; v2@-110,410 C27.1@-60,410 -60,380 v2(-55,375) v2(-55,325) ; v1(-105,-515) -20.61,-515 ccw(c-20.61,-489.39) -2.5,-507.5 cw(c15.61,-525.61) 15.61,-500 149.43,-500 ccw(c149.43,-473.25) 176.18,-473.25 CON1.5@176.18,-330 ; U5.12@-67.53,243 -67.53,267.47 ; v2@-64,325 C26.1@-64,290 ; v1(-53,170) pad.0@-47.84,175.16 ; U5.11@-47.84,243 -47.84,267.47 -64,267.47 ; pad.0@-38,185 v1(-23,200) ; v2(15,415.16) v2(15,365.16) v2(15,315.16) v2(15,265.16) 50.36,265.16 ; v1(20,-270) 6.63,-270 6.63,-240.69 cw(c12.32,-240.69) 12.32,-235 29,-235 D1.2@75,-235 ; U5.8@20,214.53 50.36,214.53 v2(50.36,229.8) 50.36,265.16 ; C14.1@110,115 110,278 ; U6.18@152,95.63 188.38,95.63 ; C30.1@160,278 110,278 ; C30.1@162,278 v1(242,278) ; U6.20@188.38,75 188.38,95.63 ; U6.11@188.38,195 188.38,173.77 ccw(c224.95,173.77) 199.09,147.91 U6.25@212,135 188.38,111.38 188.38,95.63 ; -178,267.47 -67.53,267.47 ; -178,267.47 -178,290 v2(-103.37,290) C26.1@-64,290 ; -67.53,267.47 -64,267.47 ; -64,267.47 C26.1@-64,290 ; 50.36,265.16 50.36,267.04 61.31,278 110,278
  Top Layer w10: R2.1@-160,-525 v1(-155,-525) ; U4.20@-45.16,34 C19.1@-45.16,75.16
  Top Layer w12: U5.15@-96,175.16 -47.84,175.16 U5.2@-47.84,127 C19.1@-47.84,80 ; U5.1@-67.53,127 -67.53,155.47 v1(-53,170) ; U5.12@-67.53,243 -67.53,214.53 v1(-53,200) ; pad.0@-47.84,194.84 U5.11@-47.84,243 ; U5.3@-28.16,127 pad.0@-28.16,175.16 ; v1(-23,200) -8.47,214.53 ; pad.0@-8.47,194.84 U5.7@20,194.84 ; U5.9@-8.47,243 -8.47,214.53 ; U5.8@20,214.53 -8.47,214.53
  Mid-Layer 1 w6: -425,-235 ccw(c-400,-235) -400,-260 -255,-260 ; -340,100 -315,125 v1(-258,125) -230,97 -230,71 ; v1(-313,-447.53) -267.53,-447.53 v1(-255,-435) ; v1(-255,-405) -255,-260 ; v1(-230,-170) -240,-180 v1(-240,-257) cw(c-243,-257) -243,-260 -255,-260 ; v1@-230,30 -230,71 ; v1(-225,-405) -149,-405 v1(-149,-410.16) -117.84,-410.16 v1(-105,-423) -105,-495 ; K1.0@-170,-495 -105,-495 ; v1(-105,-515) -105,-495 ; v1(100,-115) ccw(c75,-115) 75,-90 -48,-90 cw(c-48,-55) v1(-83,-55) -83,58 -96,71 v1(-196,71) -230,71 ; v1(130,-115) 203.58,-188.58 v1(270,-188.58) 292,-188.58 ; v1(130,-85) 185.71,-29.29 cw(c256.42,-100) 256.42,0 ; v1(293,-249) 293,-188.58 v1(293,-130) ; P2.10@441.26,16.26 P2.10@450,25
  Bottom Layer w6: v1(-313,-447.53) C5.1@-313,-325 ; v1(-196,71) -126.95,71 cw(c-126.95,44.05) -100,44.05 C10.1@-100,13 -100,-11.42 U3.47@-21,-11.42 ; C3.1@-155,-334 -135,-334 ; -136.16,-423 v1(-149,-410.16) -135,-396.16 -135,-334 ; C6.1@-115,-220 R8.1@-155,-220 C4.1@-155,-255 -135,-255 -135,-334 ; v1(-105,-515) v1(-105,-423) -88,-423 ccw(c-88,-410) -75,-410 R4.1@-75,-375 -50,-375 ccw(c-50,-365) -40,-365 -40,-335 ; v1(-100,-71) v1@-83.5,-54.5 ; R6.1@-75,-295 -50,-295 cw(c-50,-305) -40,-305 -40,-335 ; C9.1@21,-275 21,-293 ; C9.1@26,-275 U3.35@26,-236 ; v2@50,229.8 C12.1@50,120 78.95,120 ccw(c78.95,132.05) 91,132.05 91,180 115,180 ; CON2.2@100.39,-331 69,-331 69,-302 60,-293 21,-293 ; C31.1@115,250 115,180 ; U3.8@144.53,41 144.53,72.66 ccw(c125.66,72.66) 139,86 139,108.26 cw(c150.74,108.26) 150.74,120 C7.1@180,120 v1(182,120) 220,120 C13.1@220,160 220,180 136,180 ; U7.8@155,235.31 136,235.31 ; U7.9@155,255 136,255 136,235.31 ; v1(293,-249) 293,-228 P2.19@369,-228 ; P2.19@369,-225 P2.19@400,-225 ; -40,-335 -8,-335 -8,-308 7,-293 21,-293 ; 115,180 136,180 ; 136,180 136,235.31
  Bottom Layer w20: -136.16,-423 v1(-105,-423)
  other v1: -400,-530 -320,-530 320,-530 400,-530 120,-450 520,-450 -225,-435 320,-370 480,-370 524,-310 -524,-259 -230,26 -50,80 140,86 224,122 222,160 -23,170 -280,190 120,190 -480,270 -400,270 -320,270 -240,270 -160,270 80,270 480,270 -440,350 -360,350 -280,350 -200,350 -120,350 40,350 120,350 200,350 280,350 360,350 440,350 520,350
  other v2: -105,415.16
IMU_AUXCL: P2.7 U6.7 | length 216.5
  Top Layer w6: v1(246,171) ccw(c246,176.37) 251.37,176.37 U6.7@251.37,195
  Mid-Layer 2 w6: v1(246,171) 262.58,171 cw(c262.58,71) 333.29,141.71 P2.7@400,75
IMU_AUXDA: P2.9 U6.21 | length 232.7
  Top Layer w6: U6.21@204.13,75 ccw(c237.51,75) 213.9,51.4 242.88,22.42 ccw(c277.69,57.22) 277.69,8 316.76,8 ccw(c316.76,18.24) 324,11 cw(c357.8,-22.8) 357.8,25 P2.9@369,25 P2.9@400,25